# Altium PCB LED_board.PcbDoc
Units mm, origin at the board's own origin, x right, y up, seen from the top; angles counter-clockwise.
Board outline 9.53 x 7.37 mm, 2 copper layers (Top Layer, Bottom Layer), stack 0.781 mm thick; 9 components, 3 nets, 20 pads, 1 vias.
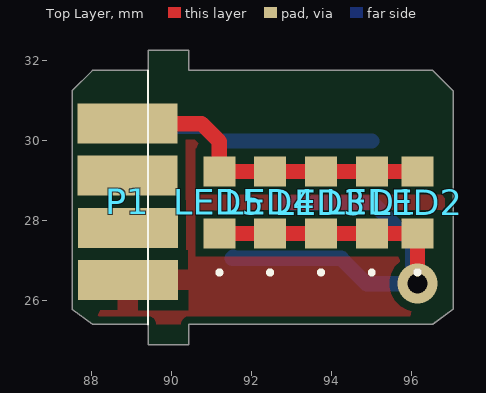
[diagram p0: Top Layer view]
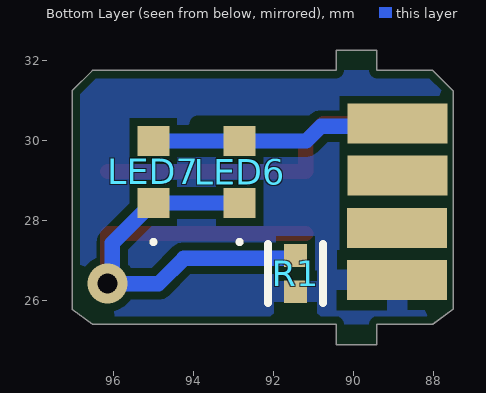
[diagram p1: Bottom Layer view, seen from below]
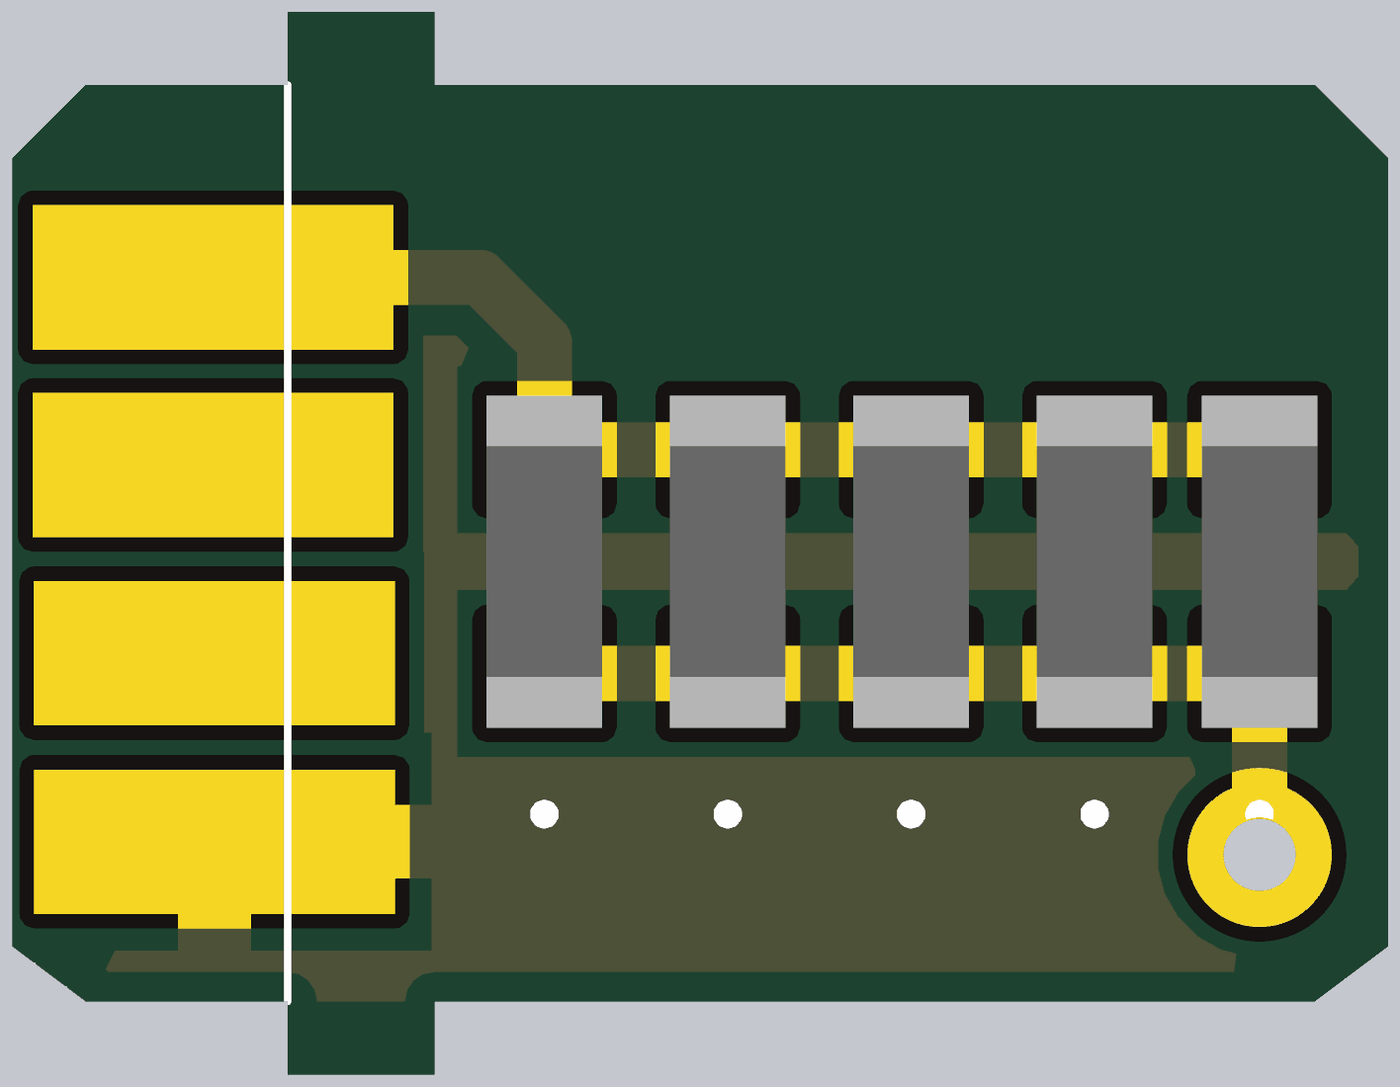
[diagram p2: 3D render of the assembled board from above, using the file's embedded part models]

## Layer stack, top to bottom
Top Solder: solder mask 0.0102, Solder Resist, Dk 3.5
Top Layer: signal copper 0.0356
Dielectric 1: dielectric 0.71, FR-4, Dk 4.8
Bottom Layer: signal copper 0.0356
Bottom Solder: solder mask 0.0102, Solder Resist, Dk 3.5

## Board outline
89.408,25.4 89.408,24.892 90.424,24.892 90.424,25.4 96.52,25.4 97.028,25.781 97.028,31.242 96.52,31.75 90.424,31.75 90.424,32.258 89.408,32.258 89.408,31.75 88.011,31.75 87.503,31.242 87.503,25.781 88.011,25.4

## Design rules (kind name [scope] priority, off if disabled: settings)
BoardOutlineClearance [All] p1: gap=0.2 ignorepadtopadclearanceinfootprint=FALSE except(0.4: Arc-SplitBarrior Arc-SplitContinuation Track-SplitBarrior Track-SplitContinuation SMDPad-SplitBarrior SMDPad-SplitContinuation THPad-SplitBarrior THPad-SplitContinuation Via-SplitBarrior Via-SplitContinuation Fill-SplitBarrior Fill-SplitContinuation Poly-SplitBarrior Poly-SplitContinuation Region-SplitBarrior Region-SplitContinuation Text-SplitBarrior Text-SplitContinuation)
Clearance "Clearance Bottom Layer" [OnLayer('Bottom Layer')] p1: gap=0.203 ignorepadtopadclearanceinfootprint=TRUE except(0.254: Arc-Text Track-Text SMDPad-Text THPad-Text Via-Text Fill-Text Poly-Text Region-Text Text-Text)
Clearance "Clearance Top Layer" [OnLayer('Top Layer')] p2: gap=0.203 ignorepadtopadclearanceinfootprint=TRUE except(0.254: Arc-Text Track-Text SMDPad-Text THPad-Text Via-Text Fill-Text Poly-Text Region-Text Text-Text)
Clearance [All] p3: gap=0.2 ignorepadtopadclearanceinfootprint=FALSE except(0.089: Arc-Arc Arc-Track Arc-SMDPad Track-Track Track-SMDPad SMDPad-SMDPad; 0.127: Arc-Via Track-Via SMDPad-Via THPad-Via Via-Via; 0.254: Arc-Text Track-Text SMDPad-Text THPad-Text Via-Text Fill-Text Poly-Text Region-Text Text-Text)
HoleSize [All] p1: absolutevalues=TRUE maxlimit=6.3 minlimit=0.2 maxpercent=80.000 minpercent=20.000
MinimumAnnularRing [All] p1: minimumring=0.076
MinimumSolderMaskSliver [All] p1: minsoldermaskwidth=0.1
PolygonConnect PolygonConnect_1 [All] p1: thpad.connectstyle=Relief thpad.reliefconductorwidth=0.508 thpad.reliefentries=4 thpad.polygonreliefangle="90 Angle" thpad.airgapwidth=0.254 smdpad.connectstyle=Relief smdpad.reliefconductorwidth=0.508 smdpad.reliefentries=4 smdpad.polygonreliefangle="90 Angle" smdpad.airgapwidth=0.254 via.connectstyle=Direct via.reliefconductorwidth=0.508 via.reliefentries=4 via.polygonreliefangle="90 Angle" via.airgapwidth=0.254
RoomDefinition LED_board [InComponentClass('LED_board')] p1: confinementstyle=ConfineIn formatcopy=TRUE lockcomponents=FALSE outline 98.171,26.924 103.759,26.924 103.759,39.878 98.171,39.878
RoutingCorners [All] p1: cornerstyle=Round minsetback=2.54 maxsetback=2.54
RoutingVias [All] p1: holewidth=0.5 width=1 viastyle="Through Hole" minholewidth=0.2 minwidth=0.4 maxholewidth=1 maxwidth=2
SilkToSilkClearance [All] p1: silktosilkclearance=0.1
SilkToSolderMaskClearance [IsPad] p1: minsilkscreentomaskgap=0.1 clearancetoexposedcopper=TRUE
SolderMaskExpansion [All] p1: expansion=0.102 istentingtop=FALSE
Width [All] p1: maxlimit=2.54 minlimit=0.089 preferedwidth=0.381
25 further rules are at their usual default settings.

## Components (designator, comment, footprint, x,y, rotation, side; value= is the part's Value field where it differs from the comment)
LED1 "LSM0603463V" LSM0603463V 94.996,28.448 r90 top
LED2 "LSM0603463V" LSM0603463V 96.139,28.448 r90 top
LED3 "LSM0603463V" LSM0603463V 93.726,28.448 r90 top
LED4 "LSM0603463V" LSM0603463V 92.456,28.448 r90 top
LED5 "LSM0603463V" LSM0603463V 91.186,28.448 r90 top
LED6 "LSM0603463V" LSM0603463V 92.837,29.21 r90 bottom
LED7 "LSM0603463V" LSM0603463V 94.996,29.21 r90 bottom
P1 "4pos_conn_tof" 4pos_conn_tof 88.87,30.363 r0 top
R1 "CRCW040210K0FKED" FP-CRCW0402-e3-IPC_B 91.44,26.67 r90 bottom

## Footprints (in the part's own frame and the unit in brackets; to place one, negate y for a bottom-side part, rotate by r counter-clockwise, add the part's x,y. Pads: shape width x height; smd on the part's side, far side on the other; paste and mask are expansions set on the pad)
4pos_conn_tof [mm]
  rect 2.5x1 all layers, no hole: 1(0.022,0.054) 2(0.022,-1.246) 3(0.03,-2.55) 4(0.032,-3.856)
FP-CRCW0402-e3-IPC_B [mm]
  rect 0.568x0.572 smd paste+0 mask+0: 1(-0.452,0) 2(0.452,0)
  silkscreen extent -0.74,-0.69 0.74,0.69
LSM0603463V [mm]
  rect 0.75x0.8 smd: 1(-0.775,0) 2(0.775,0)
  silkscreen extent -1.8,-0.05 -1.7,0.05, body extent -0.8,-0.4 0.8,0.4, height 0.6

## Part data
LED1 LED2 LED3 LED4 LED5 LED6 LED7: "LED", Manufacturer_Name="Visual Communications Company", Mouser Part Number=593-LSM0603463V, Arrow Part Number=LSM0603463V, Arrow Price/Stock=https://www.arrow.com/en/products/lsm0603463v/visual-communications, Datasheet Link=https://vcclite.com/wp-content/uploads/wpallimport/files/files/LSM0603463V.pdf, Height=0.5mm, Manufacturer_Part_Number=LSM0603463V, Mouser Price/Stock=https://www.mouser.co.uk/ProductDetail/VCC/LSM0603463V?qs=%252BEew9%252B0nqrDuPtH0dpM5ug%3D%3D
R1: library part CMP-2002-08135-2, "RES SMD 10K OHM 1% 1/16W 0402", Case Code (Imperial)=0402, Case Code (Metric)=1005, Max Operating Temperature=155°C, Max Power Dissipation=63mW, Min Operating Temperature=-55°C, Package Quantity=10, Resistance=10kR, Temperature Coefficient=100ppm/°C, Tolerance=1%, Voltage Rating=50V, Case/Package=0402, Composition="Thick Film", Contact Plating=Tin, Depth=0.5mm, Features="Automotive AEC-Q200", Height=0.35mm, Lead Free="Lead Free", Length=1mm, Military Standard=Not, Mount="Surface Mount", Number of Pins=2, Number of Terminations=2, Packaging="Tape and Reel", Power Rating=63mW, Radiation Hardening=No, Termination=SMD/SMT, Voltage Rating (DC)=50V, Weight=2.3E-05oz, Width=0.02inch

## Via types
v1: diameter 1, hole 0.5, Top Layer to Bottom Layer, 1 vias

## Nets (pads, with @x,y where several pads share a name; then routed paths per layer and width w, separated by ;. In a path a pad name is that pad's centre, name@x,y a point inside that pad or via, vN(x,y) a via of type N, cw(c..) or ccw(c..) an arc to the next point about the centre after c; other vN are vias at no path point)
GND: P1.4 R1.1
NetLED1_1: LED1.1 LED2.1 LED3.1 LED4.1 LED5.1 LED6.1 LED7.1 R1.2 | length 15.8
  Top Layer w0.381: LED5.1 LED4.1 LED3.1 LED1.1 LED2.1 v1(96.139,26.416)
  Bottom Layer w0.381: R1.2@91.536,27.076 91.511,27.051 94.234,27.051 94.869,26.416 v1(96.139,26.416) 96.021,26.534 96.021,27.435 95.021,28.435 LED7.1 LED6.1
VDD: LED1.2 LED2.2 LED3.2 LED4.2 LED5.2 LED6.2 LED7.2 P1.1 | length 14.5
  Top Layer w0.381: P1.1 90.741,30.417 91.186,29.972 LED5.2 LED4.2 LED3.2 LED1.2 LED2.2
  Bottom Layer w0.381: P1.1 88.956,30.353 90.805,30.353 91.173,29.985 LED6.2 LED7.2
pads on no net: P1.2 P1.3

## Polygon pours and split planes (outlines as drawn)
no net on Layer0 "Default Coverlay 1 Top" (split plane): 87.884,31.623 87.503,31.242 87.503,25.781 87.757,25.527 96.647,25.527 97.028,25.908 97.028,31.115 96.647,31.623
no net on Layer0 "Default Coverlay 1 Bottom" (split plane): 87.884,31.623 87.503,31.242 87.503,25.781 87.757,25.527 96.647,25.527 97.028,25.908 97.028,31.115 96.647,31.623
GND on Bottom Layer "GND_L02_P003" (solid, remove dead copper, pour order 3): 88.011,31.75 87.503,31.242 87.503,25.781 88.011,25.4 96.52,25.4 97.028,25.781 97.028,31.242 96.52,31.75
GND on Top Layer "GND_L01_P002" (solid, remove dead copper, pour order 2): 88.011,31.75 87.503,31.242 87.503,25.781 88.011,25.4 96.52,25.4 97.028,25.781 97.028,31.242 96.52,31.75

## Silkscreen, mask and mechanical layers (free items; w line width, h text height)
Top Overlay:
  lines w0.05: 89.408,25.4 89.408,31.75